# EAGLE board VCA-v1 (EAGLE 6.6.0)

No outline drawn. Coordinates in mm, seen from the top.
Copper layers (1*16): Top 0.035mm / dielectric 1.5mm / Bottom 0.035mm
Design rules "default": minimum track width 10mil, minimum drill 24mil, track to track 8mil, track to pad 8mil, pad to pad 8mil, via to via 8mil, smd to smd 8mil, copper to edge 40mil, drill to drill 8mil, minimum pad ring 10mil, minimum via ring 8mil, stop-mask expansion 4mil, vias tented up to drill 0mil, thermal gap 10mil

## Placement (x,y rotation side)
E$1  [4U_1]  0,0 0 top
E$2  [POTENTIOMETER_TAYDA_6MM]  12.7,44.45 180 top
E$3  [POTENTIOMETER_TAYDA_6MM]  12.7,132.08 180 top
E$4  [POTENTIOMETER_TAYDA_6MM]  12.7,99.06 180 top
E$5  [3.5MM_JACK_TAYDA]  13.97,160.02 180 top
E$6  [3.5MM_JACK_TAYDA]  12.7,17.78 0 top
E$7  [LED_3MM]  5.08,160.02 0 top
E$9  [3.5MM_JACK_TAYDA]  12.7,69.85 270 top

## Library data of the parts
E$1-E$7 E$9 = !synth_panel